# EAGLE board HMTRPBreakoutModule (EAGLE 6.3)
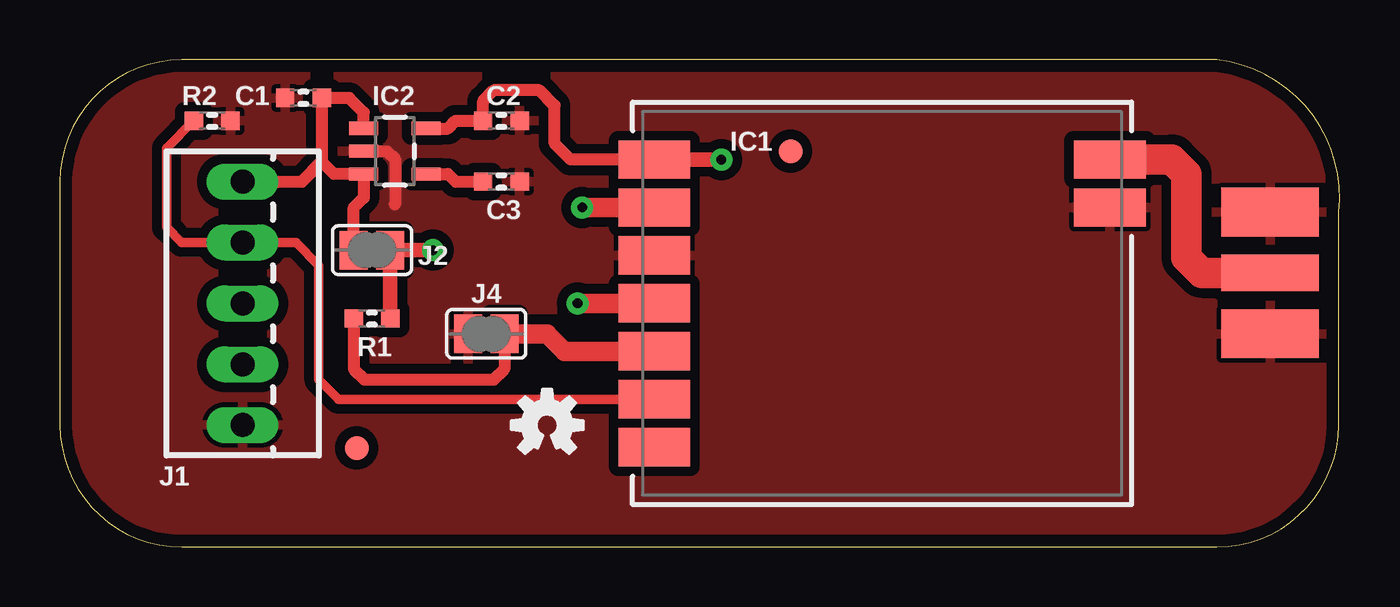
[diagram p0: board, top side]
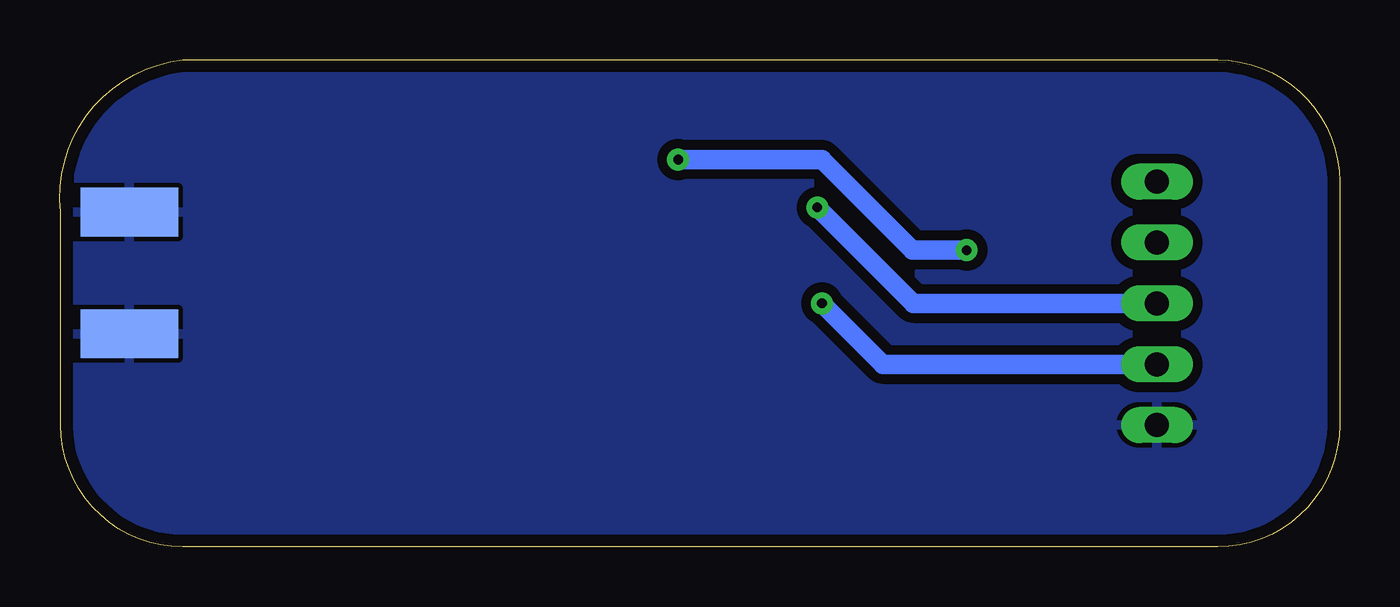
[diagram p1: board, bottom side, seen from below]

Size 53.37 x 20.32 mm. Coordinates in mm from the lower left corner, seen from the top.
Outline: 5.08,20.32 arc90 0,15.24 0,5.08 arc90 5.08,0 48.26,0 arc90 53.34,5.08 53.34,13.97 arc90 48.26,20.32 5.08,20.32
Copper layers (1*16): Top 0.035mm / dielectric 1.5mm / Bottom 0.035mm
Design rules "PCBCart-Standard *": minimum track width 8mil, minimum drill 0.4mm, track to track 8mil, track to pad 8mil, pad to pad 8mil, via to via 8mil, smd to smd 8mil, copper to edge 20mil, drill to drill 8mil, minimum pad ring 8mil, minimum via ring 10mil, stop-mask expansion 3mil, vias tented up to drill 16mil, thermal gap 8mil
Net classes: 1 power: width 0.508 mm

## Footprints (pad centres in the part's own frame; a part is rotated, then mirrored left to right if it is on the bottom)
0603 = smd 0.762 x 0.762: 1 -0.762,0; 2 0.762,0
HM-TRP-SMD = smd 1.6 x 3: !CONFIG 2,-9.5; !ENABLE 4,-9.5; AGND -4,9.5; ANT -6,9.5; DRX 0,-9.5; DTX -4,-9.5; GND -2,-9.5; TEST 6,-9.5; VCC -6,-9.5
SOT23-5 = smd 0.55 x 1.2: 1 -0.95,-1.3; 2 0,-1.3; 3 0.95,-1.3; 4 0.95,1.3; 5 -0.95,1.3
22-23-2051 = drill 1 long: 1 -5.08,0; 2 -2.54,0; 3 0,0; 4 2.54,0; 5 5.08,0
SJ = smd 1.168 x 1.6: 1 -0.762,0; 2 0.762,0
SMA-EDGE = smd 2.032 x 4.064: GND@0 -2.54,0; GND@1 2.54,0 | smd 2.032 x 4.064 bottom: GND@2 -2.54,0; GND@3 2.54,0 | smd 1.524 x 4.064: SIG 0,0
FIDUCIAL-1X2 = smd 1 x 1: 1 0,0

## Placement (x,y rotation side)
C1  2.2µF  [0603]  10.16,18.73 180 top
C2  2.2µF  [0603]  18.41,17.78 0 top
C3  470pF  [0603]  18.41,15.24 180 top
IC1  HM-TRP  [HM-TRP-SMD]  34.29,10.16 270 top
IC2  MIC5219-3.3YM5  [SOT23-5]  13.97,16.51 270 top
J1  Interface  [22-23-2051]  7.62,10.16 270 top
J2  Regulator Bypass  [SJ]  13.02,12.38 0 top
J3  Antenna  [SMA-EDGE]  50.48,11.43 90 top
J4  Config  [SJ]  17.78,8.89 0 top
JP1  FIDUCIAL1X2  [FIDUCIAL-1X2]  12.38,4.13 0 top
JP2  FIDUCIAL1X2  [FIDUCIAL-1X2]  30.48,16.51 0 top
R1  10kΩ  [0603]  13.02,9.53 180 top
R2  10kΩ  [0603]  6.35,17.78 0 top
SY  OSHW-LOGOS  [OSHW-LOGO-S]  20.32,5.08 0 top

## Library data of the parts
C1-C3 R1 R2 = freetronics-master-v1; PACKAGE: 0603
IC1 J3 = 3DRobotics
IC2 = SparkFun; PACKAGE: SOT23-5
J1 = con-molex; MF: MOLEX; MPN: 22-23-2051; OC_FARNELL: 1462952; OC_NEWARK: 38C9178
J2 J4 = freetronics-luke
JP1 JP2 SY = SparkFun

## Nets
+3V3: C2.1 IC1.VCC IC2.5 J2.2 R1.1
+5V: C1.1 IC2.1 IC2.3 J1.1 J2.1
GND: C1.2 C2.2 C3.1 IC1.AGND IC1.GND IC2.2 J1.5 J3.GND@0 J3.GND@1 J3.GND@2 J3.GND@3 J4.1 R2.2
N$6: IC1.!ENABLE J1.2 R2.1
N$7: IC1.DTX J1.3
N$8: IC1.ANT J3.SIG
N$11: IC1.DRX J1.4
N$13: C3.2 IC2.4
N$14: IC1.!CONFIG J4.2 R1.2

## Tracks (layer width: path | path; a pad name or v marks a point on that pad's centre or on a via)
+3V3  (via drill 0.4)
  Top 0.508: IC2.5 16.19,17.46 16.51,17.78 C2.1 17.65,18.61 18.1,19.05 20,19.05 20.64,18.41 20.64,16.83 21.3,16.16 IC1.VCC
  Top 0.61: v15.56,12.38 J2.2 R1.1 | v27.59,16.16 IC1.VCC
  Bottom 0.813: v15.56,12.38 17.81,12.38 21.59,16.16 v27.59,16.16
+5V
  Top 0.406: IC2.3 | IC2.1
  Top 0.508: IC2.3 12.67,14.57 12.26,14.16 J2.1 | IC2.3 11.43,15.56 10.92,16.07 | 10.92,16.07 C1.1 12.07,18.73 12.67,18.13 IC2.1 | J1.1 10.1,15.24 10.92,16.07
GND
  Top 0.508: IC2.2 13.65,16.51 13.97,16.19 13.97,14.29
  pour Top (isolate 0.406): -1.27,21.59 54.61,21.59 54.61,-1.27 -1.27,-1.27
  pour Bottom (isolate 0.406): -1.27,21.59 54.61,21.59 54.61,-1.27 -1.27,-1.27
N$6
  Top 0.406: IC1.!ENABLE 11.62,6.16 10.79,6.99 10.79,11.75 9.84,12.7 J1.2 5.08,12.7 4.45,13.34 4.45,16.64 R2.1
N$7  (via drill 0.4)
  Top 0.813: IC1.DTX v21.78,14.16
  Bottom 0.813: v21.78,14.16 17.78,10.16 J1.3
N$8
  Top 1.27: IC1.ANT 46.39,16.16 46.99,15.56 46.99,12.07 47.62,11.43 J3.SIG
N$11  (via drill 0.4)
  Top 0.813: IC1.DRX v21.59,10.16
  Bottom 0.813: v21.59,10.16 19.05,7.62 J1.4
N$13
  Top 0.508: IC2.4 16.19,15.56 16.51,15.24 C3.2
N$14
  Top 0.508: R1.2 12.26,7.43 12.7,6.99 18.1,6.99 18.54,7.43 J4.2
  Top 0.813: IC1.!CONFIG 21.05,8.16 20.32,8.89 J4.2

## Text on the board
tValues: VCC | !EN | Reg Bypass | TXD | Config | RXD | GND | 900 MHz / 50Ω | HM-TRP Breakout Module | Luke Weston, 2013